# EAGLE board clk_slave (EAGLE 9.6.1)
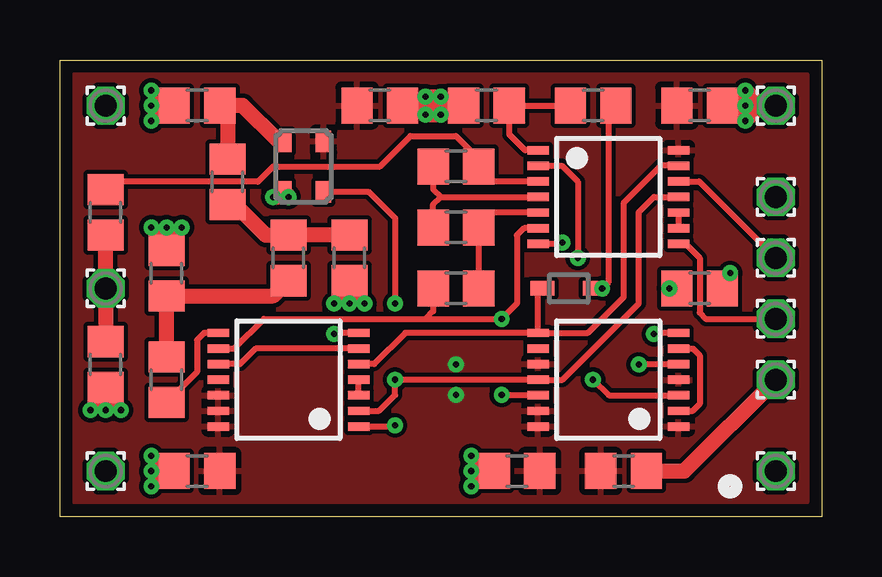
[diagram p0: board, top side]
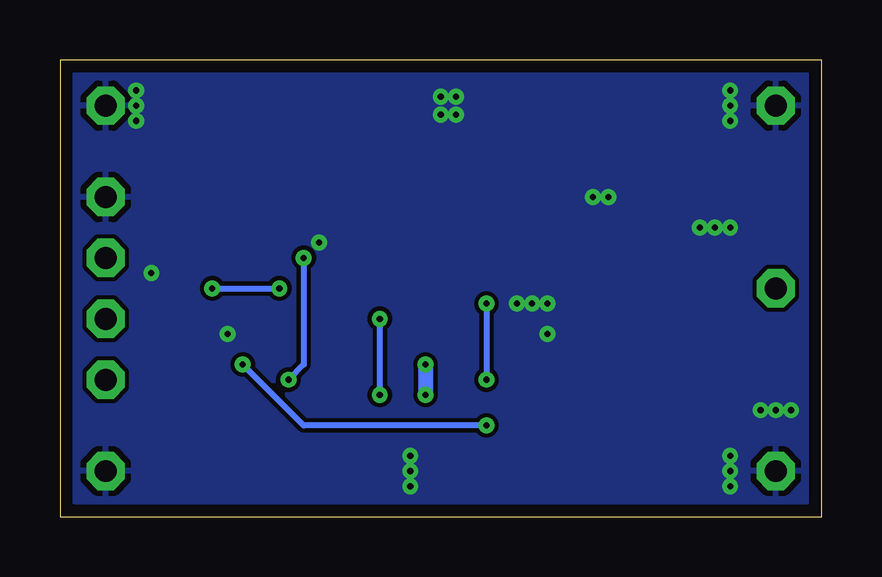
[diagram p1: board, bottom side, seen from below]

Size 31.75 x 19.05 mm. Coordinates in mm from the lower left corner, seen from the top.
Outline: 0,0 0,19.05 31.75,19.05 31.75,0 0,0
Copper layers (1*16): Top 0.035mm / dielectric 0.5mm / Bottom 0.035mm
Design rules "33each *": minimum track width 5mil, minimum drill 10mil, track to track 5mil, track to pad 5mil, pad to pad 5mil, via to via 5mil, smd to smd 5mil, copper to edge 20mil, drill to drill 8mil, minimum pad ring 10mil, minimum via ring 8mil, stop-mask expansion 4mil, vias tented up to drill 0mil, thermal gap 10mil

## Footprints (pad centres in the part's own frame; a part is rotated, then mirrored left to right if it is on the bottom)
R0805 = smd 1.3 x 1.5: 1 -0.95,0; 2 0.95,0
SOD323 = smd 1 x 0.6: 1 -1.1,0; 2 1.1,0
1,6/0,9 = drill 0.914 pad 1.6 octagon: 1 0,0
ASE = smd 0.9 x 0.65: 1 -1.05,-0.825; 2 1.05,-0.825; 3 1.05,0.825; 4 -1.05,0.825
TSSOP14 = smd 0.35 x 0.9: 1 -1.95,-2.925; 2 -1.3,-2.925; 3 -0.65,-2.925; 4 0,-2.925; 5 0.65,-2.925; 6 1.3,-2.925; 7 1.95,-2.925; 8 1.95,2.925; 9 1.3,2.925; 10 0.65,2.925; 11 0,2.925; 12 -0.65,2.925; 13 -1.3,2.925; 14 -1.95,2.925

## Placement (x,y rotation side)
C1  1n  [R0805]  1.91,12.7 90 top
C2  100n  [R0805]  5.71,17.14 180 top
C3  100n  [R0805]  12.06,10.79 270 top
C4  100n  [R0805]  4.45,10.16 270 top
C5  100n  [R0805]  5.71,1.91 180 top
C6  100n  [R0805]  13.34,17.14 0 top
C7  100n  [R0805]  19.05,1.91 180 top
C8  100n  [R0805]  26.67,17.14 0 top
C9  10u  [R0805]  17.78,17.14 0 top
C10  1n  [R0805]  16.51,12.06 0 top
D1  MMDL914T1G  [SOD323]  21.21,9.53 180 top
L1  FERRITE  [R0805]  23.5,1.91 180 top
P1  [1,6/0,9]  1.91,17.14 0 top
P2  [1,6/0,9]  1.91,9.53 0 top
P3  [1,6/0,9]  1.91,1.91 0 top
P4  [1,6/0,9]  29.84,1.91 0 top
P5  [1,6/0,9]  29.84,5.71 0 top
P6  [1,6/0,9]  29.84,8.26 0 top
P7  [1,6/0,9]  29.84,10.79 0 top
P8  [1,6/0,9]  29.84,13.34 0 top
P9  [1,6/0,9]  29.84,17.14 0 top
R1  49.9  [R0805]  1.91,6.35 270 top
R2  3.3k  [R0805]  6.99,13.97 270 top
R3  1k  [R0805]  9.53,10.79 270 top
R4  330  [R0805]  4.45,5.71 90 top
R5  1k  [R0805]  22.23,17.14 180 top
R6  33k  [R0805]  16.51,14.61 180 top
R7  33k  [R0805]  16.51,9.53 180 top
R8  47k  [R0805]  26.67,9.53 180 top
U1  SIT3808AI-22-33NB-25.000000Y  [ASE]  10.16,14.61 270 top
U2  74LVCU04A  [TSSOP14]  22.86,13.34 270 top
U3  74LVC86A  [TSSOP14]  9.53,5.71 90 top
U4  74LVC74A  [TSSOP14]  22.86,5.71 90 top

## Library data of the parts
C1-C10 D1 L1 R1-R8 = ref-packages
P1-P9 = wirepad
U1 = crystal
U2-U4 = 74xx-us

## Nets
!INV: U4.2 U4.6
!OCLK: U2.9 U2.10
!PPS: D1.2 U2.13 U3.5 U4.8
AMP1: C1.2 R6.1 U2.3
AMP2: C10.1 R6.2 U2.4
AMP3: C10.2 R7.1 U2.5
BPSK: R7.2 U2.6 U3.9 U4.12
CLK: P6.1 U2.8
DELAY: C9.2 R5.2 U2.1
FB: R4.1 U3.8
FILT1: C4.2 R3.2 R4.2
FILT2: C3.1 R2.2 R3.1
FILT3: C2.1 R2.1 U1.1
GND: C2.2 C3.2 C4.1 C5.2 C6.2 C7.2 C8.2 C9.1 P1.1 P3.1 P4.1 P8.1 P9.1 R1.2 R8.1 U1.2 U2.7 U3.7 U4.7
INV: U3.1 U4.5
LCLK: U3.6 U3.10
OCLK: U3.3 U3.4
OSC: U1.3 U2.11 U3.2 U4.11
PPS: P7.1 U2.12
REF: C1.1 P2.1 R1.1
TIMER: D1.1 R5.1 R8.2
TOGGLE: U2.2 U4.3
V3.3: C5.1 C6.1 C7.1 C8.1 L1.2 U1.4 U2.14 U3.12 U3.13 U3.14 U4.1 U4.4 U4.10 U4.13 U4.14
VIN: L1.1 P5.1

## Tracks (layer width: path | path; a pad name or v marks a point on that pad's centre or on a via)
!INV
  Top 0.254: U4.2 26.39,4.42 26.67,4.7 26.67,6.73 26.39,7.01 U4.6
!OCLK
  Top 0.254: U2.10 U2.9
!PPS
  Top 0.254: U3.5 13.1,6.37 14.4,7.67 U4.8 | U4.8 22.02,7.67 23.5,9.14 23.5,13.08 25.05,14.63 U2.13 | U4.8 19.93,9.35 D1.2
AMP1
  Top 0.254: U2.3 18.08,13.98 R6.1 17.14,14.92 17.14,15.24 16.51,15.88 14.61,15.88 13.34,14.61 8.89,14.61 8.26,13.97 2.23,13.97 C1.2
AMP2
  Top 0.254: 15.88,13.34 U2.4 | R6.2 15.56,13.65 15.88,13.34 | C10.1 15.56,13.02 15.88,13.34
AMP3
  Top 0.254: U2.5 18.08,12.69 C10.2 R7.1
BPSK  (via drill 0.25)
  Top 0.254: 15.24,8.26 v18.41,8.26 19.05,8.89 19.05,11.74 19.35,12.04 U2.6 | R7.2 15.56,8.57 15.24,8.26 | U3.9 7.27,7.01 8.51,8.26 15.24,8.26 | U4.12 18.43,5.07 v18.41,5.08
  Bottom 0.254: v18.41,5.08 v18.41,8.26
CLK
  Top 0.254: U2.8 26.08,11.38 26.67,10.79 26.67,8.51 26.92,8.26 P6.1
DELAY
  Top 0.254: R5.2 C9.2 18.73,15.94 19.39,15.29 U2.1
FB
  Top 0.254: R4.1 5.71,6.04 5.71,7.37 6.01,7.67 U3.8
FILT1
  Top 0.635: R4.2 C4.2 8.89,9.21 R3.2
FILT2
  Top 0.635: C3.1 R3.1 8.57,11.74 7.3,13.02 R2.2
FILT3
  Top 0.635: R2.1 6.99,16.51 6.67,16.83 C2.1 7.62,17.14 9.11,15.65 U1.1
GND  (via drill 0.25)
  Top 0.254: v11.43,7.62 11.47,7.67 U3.7 | U2.7 20.91,11.38 v20.95,11.43 | U4.7 24.81,7.67 v24.77,7.62
  Top 0.635: v4.45,12.06 C4.1 4.45,11.43 | v1.91,4.45 R1.2 1.91,5.08 | v3.81,17.14 C2.2 4.45,17.14 | 4.45,17.14 v3.81,17.78 | 4.45,17.14 v3.81,16.51 | 1.91,5.08 v1.27,4.45 | 1.91,5.08 v2.54,4.45 | v12.06,8.89 C3.2 12.06,9.53 | 12.06,9.53 v11.43,8.89 | 12.06,9.53 v12.7,8.89 | v3.81,12.06 4.45,11.43 | v5.08,12.06 4.45,11.43 | v3.81,1.91 C5.2 4.45,1.91 | 4.45,1.91 v3.81,2.54 | 4.45,1.91 v3.81,1.27 | v9.53,13.34 9.53,13.37 U1.2 9.12,13.34 v8.89,13.34 | 14.86,17.14 v15.24,16.76 v15.88,16.76 16.26,17.14 | 14.86,17.14 C6.2 C9.1 16.26,17.14 | 14.86,17.14 v15.24,17.53 v15.88,17.53 16.26,17.14 | v17.14,1.91 C7.2 17.78,1.91 | 17.78,1.91 v17.14,2.54 | 17.78,1.91 v17.14,1.27 | 27.94,17.14 v28.57,17.78 29.21,17.14 | 27.94,17.14 C8.2 v28.57,17.14 29.21,17.14 | 27.94,17.14 v28.57,16.51 29.21,17.14 | 29.21,17.14 P9.1 | R8.1 27.94,9.85 v27.94,10.16
  pour Bottom (isolate 0.178): 0.64,18.41 31.11,18.41 31.11,0.64 0.64,0.64
INV  (via drill 0.25)
  Top 0.254: U3.1 13.93,3.77 v13.97,3.81 | v24.13,6.35 24.14,6.37 U4.5
  Bottom 0.254: v13.97,3.81 21.59,3.81 v24.13,6.35
LCLK
  Top 0.254: U3.10 7.51,6.37 8.16,7.01 U3.6
OCLK
  Top 0.254: U3.3 U3.4
OSC  (via drill 0.25)
  Top 0.254: U1.3 12.86,13.55 13.97,12.45 v13.97,8.89 | U2.11 24.77,13.34 24.13,12.7 24.13,8.89 20.95,5.71 U4.11 v13.97,5.71 13.97,5.08 13.3,4.42 U3.2
  Bottom 0.254: v13.97,8.89 v13.97,5.71
PPS
  Top 0.254: U2.12 26.66,13.98 P7.1
REF
  Top 0.635: C1.1 P2.1 R1.1
TIMER  (via drill 0.25)
  Top 0.254: R8.2 v25.4,9.53 | R5.1 22.86,16.83 22.86,9.78 v22.61,9.53 D1.1
  Bottom 0.254: v25.4,9.53 v22.61,9.53
TOGGLE  (via drill 0.25)
  Top 0.254: U2.2 20.93,14.63 21.59,13.97 v21.59,10.79 | v22.23,5.71 22.88,5.07 U4.3
  Bottom 0.254: v21.59,10.79 21.59,6.35 v22.23,5.71
V3.3  (via drill 0.25)
  Bottom 0.635: v16.51,6.35 v16.51,5.08
  pour Top (isolate 0.178): 0.64,18.41 31.11,18.41 31.11,0.64 0.64,0.64
VIN
  Top 0.635: L1.1 26.04,1.91 P5.1